# Altium PCB B6V2.PcbDoc
Units mil, origin at the board's own origin, x right, y up, seen from the top; angles counter-clockwise.
Board outline 2318.24 x 2318.21 mil, 2 copper layers (Top Layer, Bottom Layer); 122 components, 69 nets, 341 pads, 101 vias.
Unrouted connection lines stored in the file: 62.
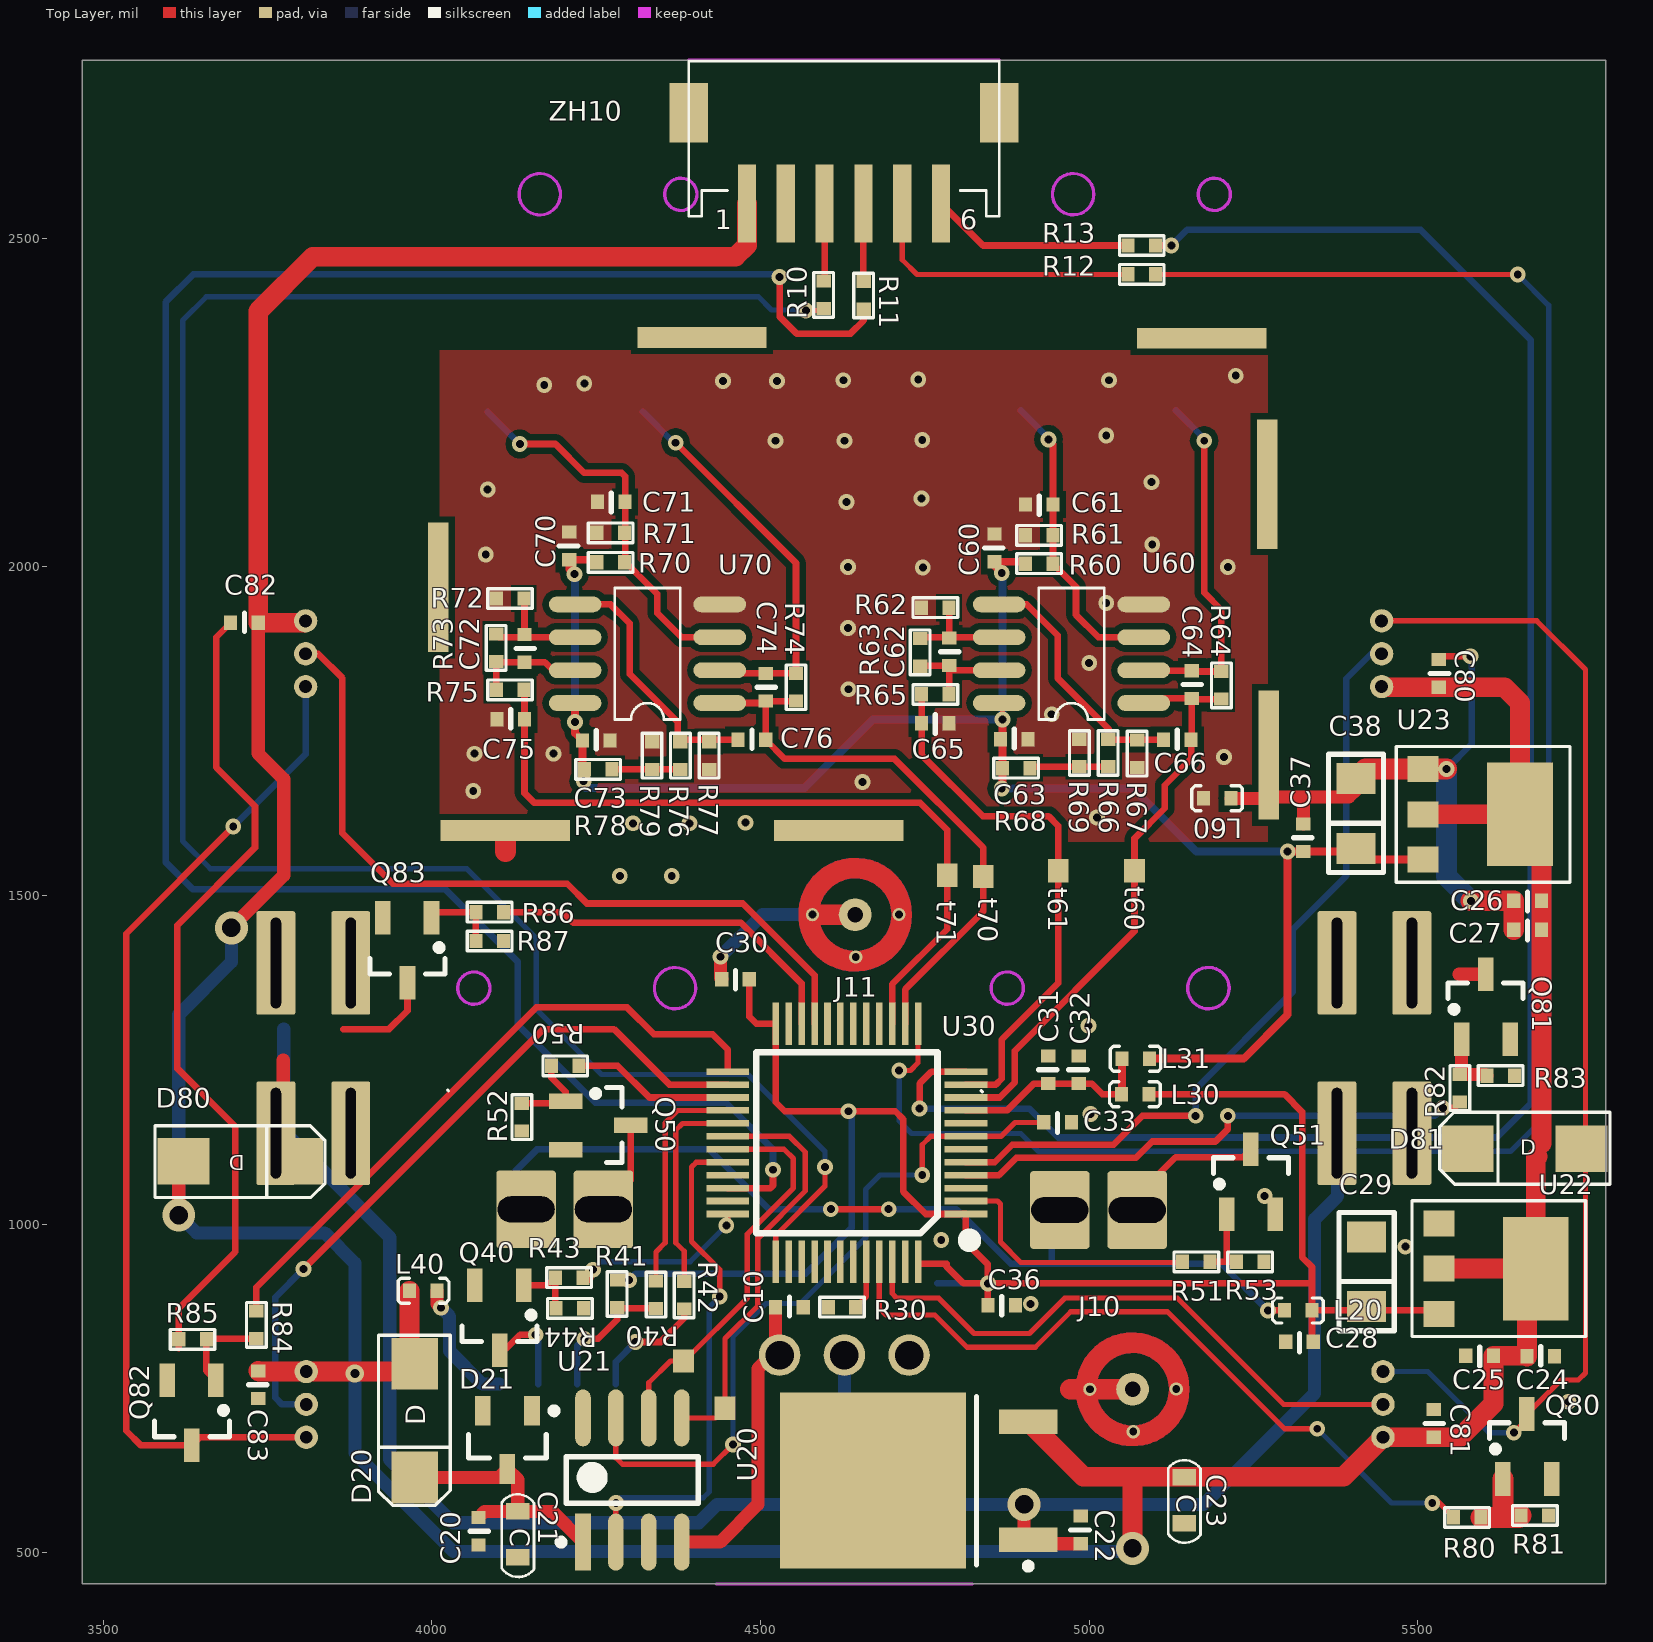
[diagram p0: Top Layer view]
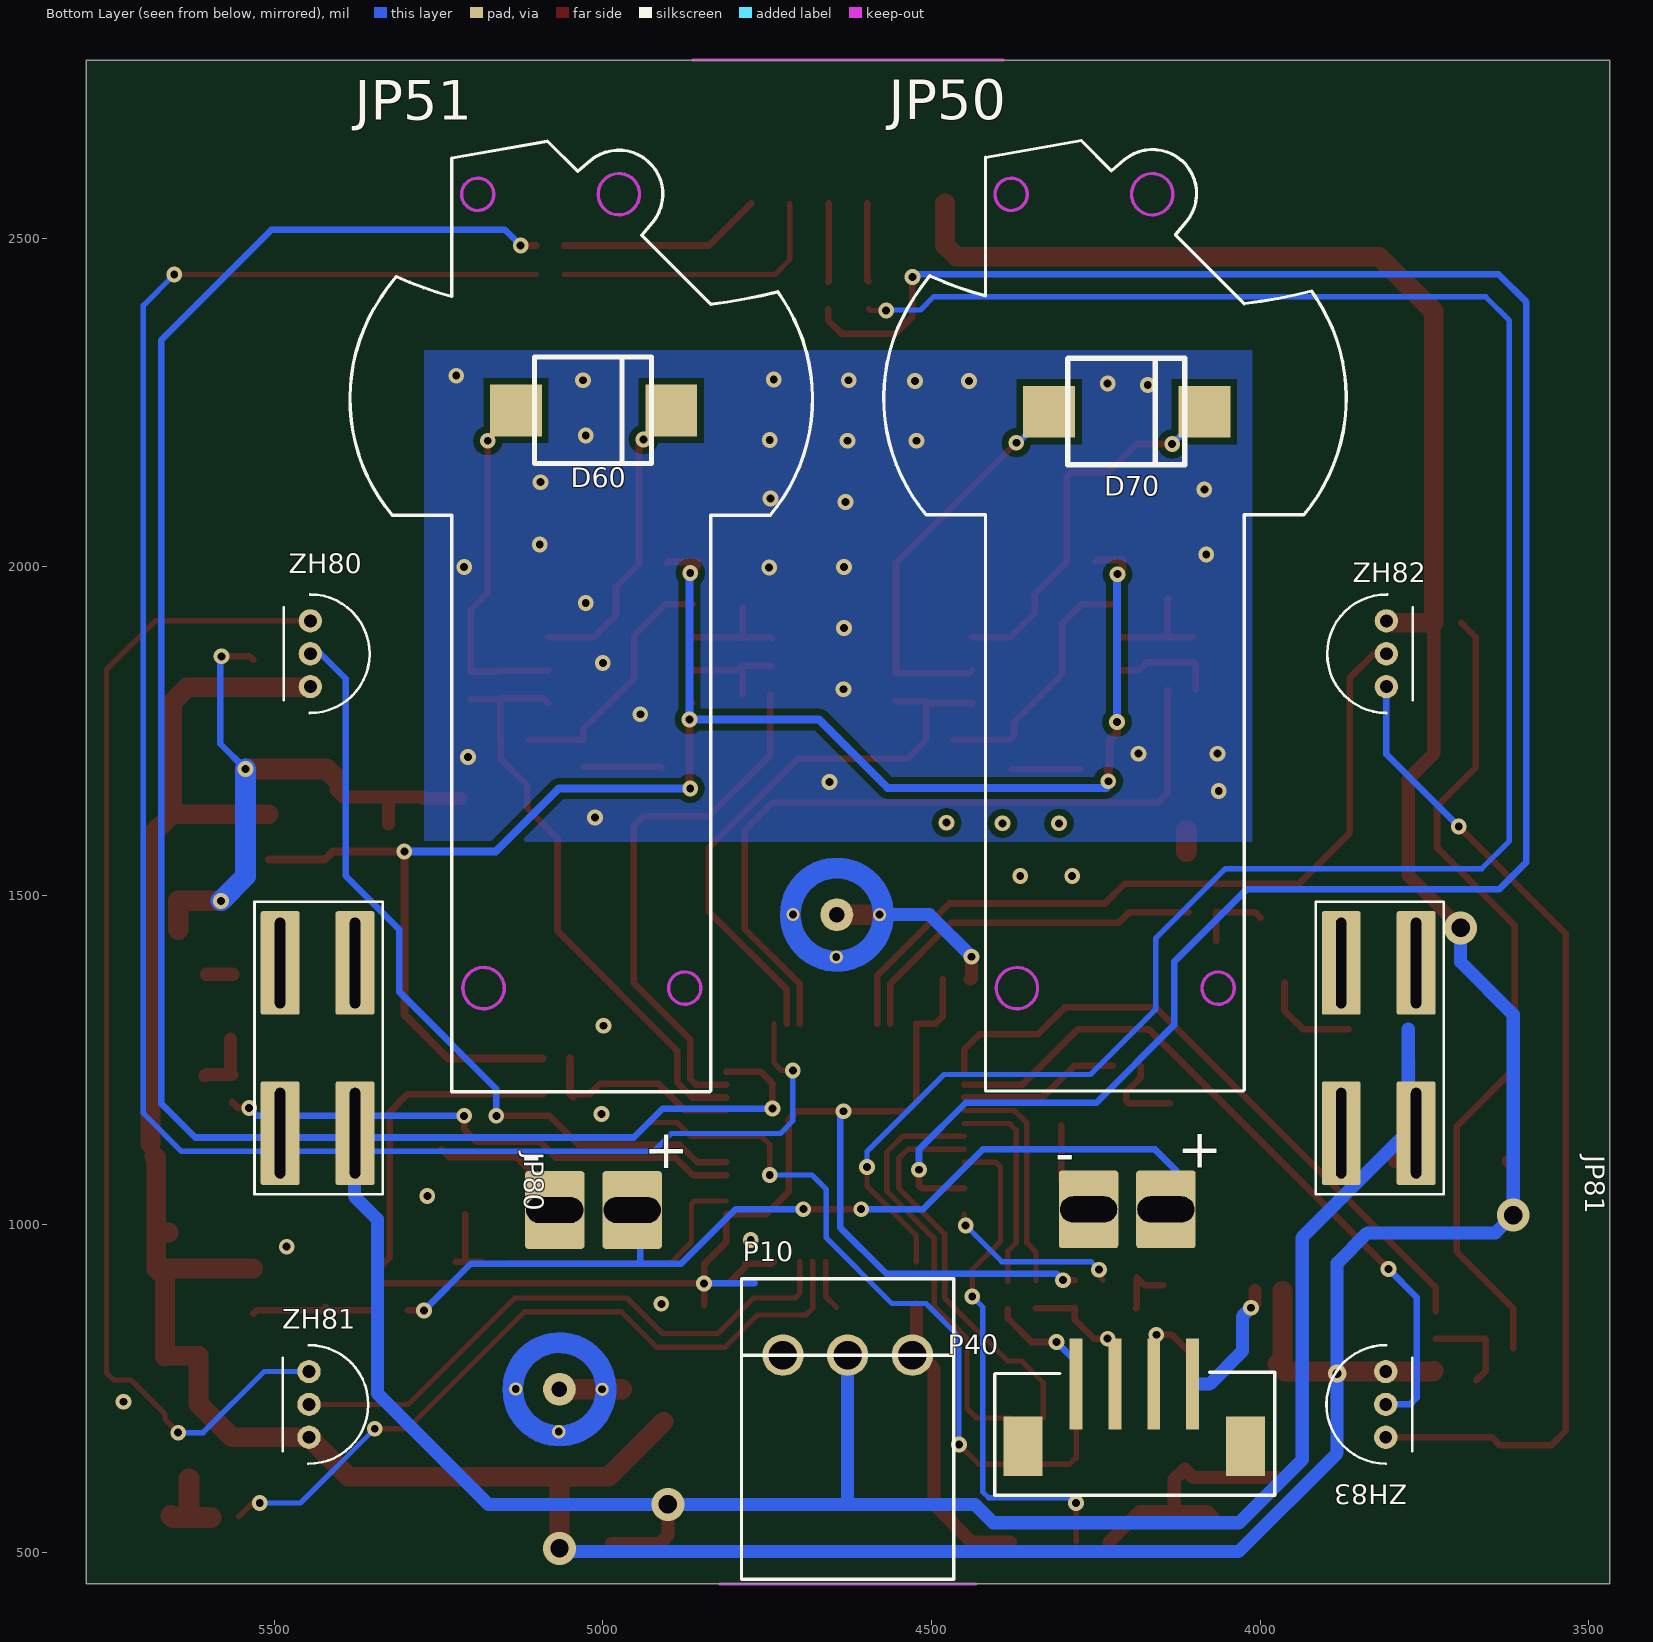
[diagram p1: Bottom Layer view, seen from below]

## Layer stack, top to bottom
Top Layer: signal copper 1.4
Dielectric: dielectric 12.6, FR-4, Dk 4.8
Bottom Layer: signal copper 1.4

## Board outline
3467.94,452.9 3467.94,2771.11 5786.17,2771.11 5786.17,452.9

## Design rules (kind name [scope] priority, off if disabled: settings)
Clearance Clearance_1 [(InNet('AGND') OR InNet('AGND2'))] p1: gap=10
Clearance [All] p2: gap=8
ComponentClearance [All] p1: gap=8 collisioncheckmode=3 verticalgap=8 showdistances=FALSE
PlaneConnect [All] p1: planeconnectstyle=Direct reliefexpansion=20 reliefentries=4 reliefconductorwidth=10 reliefairgap=10
PolygonConnect [All] p1: connectstyle=Direct reliefconductorwidth=10 reliefentries=4 polygonreliefangle="90 Angle"
RoutingVias [All] p1: holewidth=20 width=40 viastyle="Through Hole" minholewidth=12 minwidth=20 maxholewidth=100 maxwidth=200
SilkscreenOverComponentPads [All] p1: minsilkscreentomaskgap=10
SolderMaskExpansion [All] p1: expansion=4
Width [All] p1: maxlimit=100 minlimit=8 preferedwidth=10
25 further rules are at their usual default settings.

## Classes and differential pairs
component class CHECK2: C70 C71 C72 C73 C74 C75 C76 D70 R70 R71 R72 R73 R74 R75 R76 R77 R78 R79 t70 t71 U70
component class CHECK: C60 C61 C62 C63 C64 C65 C66 D60 L60 R60 R61 R62 R63 R64 R65 R66 R67 R68 R69 t60 t61 U60
component class LASER: JP50 JP51 Q50 Q51 R50 R51 R52 R53
component class FAN: L40 P40 Q40 R40 R41 R42 R43 R44
component class MCU_STM32: C30 C31 C32 C33 C36 L30 L31 R30 U30
component class POWER: C20 C21 C22 C23 C24 C25 C26 C27 C28 C29 C37 C38 D20 D21 L20 U20 U21 U22 U23
component class INTERFACE: C10 J10 J11 P10 R10 R11 R12 R13 ZH10
component class TEMP+HEATER: C80 C81 C82 C83 D80 D81 JP80 JP81 Q80 Q81 Q82 Q83 R80 R81 R82 R83 R84 R85 R86 R87 ZH80 ZH81 ZH82 ZH83

## Components (designator, comment, footprint, x,y, rotation, side; value= is the part's Value field where it differs from the comment)
C10 "220pF" C0402 4523,874 r0 top
C20 "0.1uf" C0402 4071,554 r270 top
C21 "22uF" C0603 4132,530 r270 top
C22 "0.1uf" C0402 4987,514 r90 top
C23 "22uF" C0603 5146,582 r270 top
C24 "22uF" C0402 5666,799 r0 top
C25 "0.1uf/50v" C0402 5615,800 r180 top
C26 "1uf/16v" C0402 5688,1492 r180 top
C27 "0.1uf/50v" C0402 5688,1448 r180 top
C28 "1uf/16v" C0402 5341,821 r180 top
C29 "10uf/16v" AVX_A 5422,981 r270 top
C30 "0.1uf" C0402 4483,1373 r180 top
C31 "1uf" C0402 4938,1214 r90 top
C32 "10nf" C0402 4984,1214 r90 top
C33 "1uf" C0402 4973,1155 r180 top
C36 "4.7uf" C0402 4888,877 r180 top
C37 "1uf/16v" C0402 5326,1567 r90 top
C38 "10uf/16v" AVX_A 5406,1678 r270 top
C60 "0.1uf" C0402 4856,2008 r90 top
C61 "0.1uf" C0402 4945,2095 r180 top
C62 "100pf" C0402 4787,1892 r270 top
C63 "0.1uf" C0402 4865,1738 r0 top
C64 "0.5pf" C0402 5156,1842 r270 top
C65 "100pf/16v" C0402 4787,1762 r180 top
C66 "68nf/16v" C0402 5113,1737 r0 top
C70 "0.1uf" C0402 4209,2011 r90 top
C71 "0.1uf" C0402 4294,2099 r180 top
C72 "100pf" C0402 4141,1897 r270 top
C73 "0.1uf" C0402 4229,1736 r0 top
C74 "0.5pf" C0402 4508,1838 r270 top
C75 "68nf/16v" C0402 4099,1768 r0 top
C76 "68nf/16v" C0402 4466,1737 r0 top
C80 "68nf/16v" C0402 5532,1859 r270 top
C81 "68nf/16v" C0402 5524,718 r270 top
C82 "68nf/16v" C0402 3694,1915 r0 top
C83 "68nf/16v" C0402 3736,735 r90 top
D20 "SS34" BGY220D 3966,721 r270 top
D21 "LBZX84C3V6LT1G" SOT-23_N 4115,672 r270 top
D60 "Photo Sen" PhotoSen 5014,2238 r90 bottom locked
D70 "Photo Sen" PhotoSen 4203,2236 r90 bottom locked
D80 "SS34" BGY220D 3689,1088 r0 top
D81 "SS34" BGY220D 5682,1123 r180 top
J10 "Socket" SPRING_2SIDES#1 5066,749 r0 top
J11 "Socket" SPRING_2SIDES#2 4644,1471 r0 top
JP50 "Header" LASERJACK#1 4291,2306 r180 bottom
JP51 "Header" LASERJACK#2 5103,2305 r180 bottom
JP80 "Header" PTC_4pin 5369.92,1075.56 r0 bottom locked
JP81 "Header" PTC_4pin 3755.75,1075.56 r0 bottom locked
L20 "Inductor" L0402 5299,869 r0 top
L30 "Inductor" L0402 5051,1198 r0 top
L31 "Inductor" L0402 5052,1252 r0 top
L40 "Inductor" L0402 4006,899 r180 top
L60 "Inductor" L0402 5176,1648 r0 top
P10 "Header 3" 53426-3 4789,801 r180 bottom
P40 "Header 4" ZH1.5_4pin_90b 4280,757 r180 bottom
Q40 "AO3401" SI2300 4103,848 r270 top
Q50 "AO3401" SI2300 4263,1151 r0 top
Q51 "AO3401" SI2300 5246,1075 r90 top
Q80 "AO3400" SI2300 5666,672 r90 top
Q81 "AO3400" SI2300 5603,1341 r90 top
Q82 "AO3400" SI2300 3635,703 r270 top
Q83 "AO3400" SI2300 3963,1407 r270 top
R10 "100R" R0402 4596,2393 r90 top
R11 "100R" R0402 4657,2392 r90 top
R12 "100R" R0402 5101,2445 r180 top
R13 "100R" R0402 5101,2489 r180 top
R30 "10K" R0402 4603,874 r0 top
R40 "10K" R0402 4341,872 r90 top
R41 "10K" R0402 4282,915 r270 top
R42 "30K" R0402 4384,913 r270 top
R43 "20" R0402 4188,919 r0 top
R44 "10k" R0402 4189,872 r0 top
R50 "20" R0402 4182,1241 r0 top
R51 "20" R0402 5184,943 r180 top
R52 "10k" R0402 4137,1184 r270 top
R53 "10k" R0402 5224,943 r0 top
R60 "2.7k" R0402 4903,2005 r0 top
R61 "1K" R0402 4945,2048 r180 top
R62 "3k" R0402 4745,1938 r0 top
R63 "220k" R0402 4743,1891 r270 top
R64 "10m" R0402 5201,1841 r270 top
R65 "2k" R0402 4745,1806 r0 top
R66 "1M" R0402 5029,1738 r270 top
R67 "510" R0402 5073,1737 r270 top
R68 "1M" R0402 4868,1694 r0 top
R69 "1M" R0402 4985,1696 r90 top
R70 "2.7k" R0402 4251,2007 r0 top
R71 "1K" R0402 4293,2052 r180 top
R72 "3k" R0402 4098,1952 r0 top
R73 "220k" R0402 4098,1898 r270 top
R74 "10m" R0402 4554,1838 r270 top
R75 "2k" R0402 4140,1813 r180 top
R76 "1M" R0402 4378,1734 r270 top
R77 "510" R0402 4422,1734 r270 top
R78 "510" R0402 4232,1692 r0 top
R79 "510" R0402 4335,1692 r90 top
R80 "20" R0402 5596,554 r180 top
R81 "10k" R0402 5657,557 r0 top
R82 "20" R0402 5564,1228 r270 top
R83 "10k" R0402 5605,1226 r0 top
R84 "20" R0402 3733,826 r90 top
R85 "10k" R0402 3657,825 r180 top
R86 "20" R0402 4067,1475 r0 top
R87 "10k" R0402 4067,1431 r0 top
t20 "pad_1X1" pad_0603 4383,793 r90 top
t21 "pad_1X1" pad_0603 4446,721 r90 top
t60 "pad_1X1" pad_0603 5069,1539 r90 top
t61 "pad_1X1" pad_0603 4953,1539 r90 top
t70 "pad_1X1" pad_0603 4839,1530 r90 top
t71 "pad_1X1" pad_0603 4784,1532 r90 top
U20 "BD750L5FP" TO252-3 4740,610 r180 top
U21 "TAJ1028/3V3" SO-8#1 4305,611 r90 top
U22 "HT7333" SOT-89 5491,1036 r270 top
U23 "HT7333" SOT-89 5467,1727 r270 top
U30 "STM32F030C8T6X" LQFP48S 4813,1016 r180 top
U60 "LMC6492" SO-8#2 5083,1793 r180 top
U70 "LMC6492" SO-8#2 4438,1793 r180 top
ZH10 "ZH-6ABW" ZH-6ABW 4627,2553 r0 top locked
ZH80 "ZH-3A" DS18B20 5445,1868 r90 bottom
ZH81 "ZH-3A" DS18B20 5447,726 r90 bottom locked
ZH82 "ZH-3A" DS18B20 3808,1868 r270 bottom
ZH83 "ZH-3A" DS18B20 3809,726 r270 bottom

## Footprints (in the part's own frame and the unit in brackets; to place one, negate y for a bottom-side part, rotate by r counter-clockwise, add the part's x,y. Pads: shape width x height; smd on the part's side, far side on the other; paste and mask are expansions set on the pad)
53426-3 [mm]
  round 1.6 hole 1.1: 1(1.6,0) 2(4.1,0) 3(6.6,0)
  silkscreen extent 0,-8.66 8.2,2.95
AVX_A [mm]
  rect 1.2x1.5 smd: 1(2.7,0) 2(0,0)
  silkscreen extent -0.94,-1.07 3.63,1.07
BGY220D [mm]
  rect 2x1.8 smd: 1(-1.7,0.2) 2(2.7,0.2)
  silkscreen extent -2.8,-1.2 3.77,1.58
C0402 [mil] "CAP_NP_C0402"
  rect 20x22 smd: 1(0,0) 2(42,0)
  silkscreen extent 21,-13 21,15
C0603 [mm]
  rect 0.635x0.9 smd: 1(-0.845,-0.031) 2(0.93,-0.031)
  silkscreen extent -1.5,-0.66 1.69,0.59
DS18B20 [mm]
  round 0.9 hole 0.5: 1(1.27,0) 2(0,0) 3(-1.27,0)
  silkscreen extent -2.29,-2.29 2.29,1.02
L0402 [mil]
  rect 20x22 smd: 1(-2,0) 2(40,0)
  silkscreen extent -20,-19 57,19
LASERJACK#1 [mm]
  rrect10% 2.3x3 hole 1 slot 2.2 at 0 deg: 1(3.75,-32.595) 2(0.76,-32.595)
  silkscreen extent -7.16,-28.02 10.72,8.71
LASERJACK#2 [mm]
  rrect10% 2.3x3 hole 1 slot 2.2 at 0 deg: 1(3.75,-32.595) 2(0.76,-32.595)
  Keep-Out Layer circle w0.127: c-1.994,-24.02 r0.8
  Keep-Out Layer circle w0.127: c3.234,6.658 r0.8
  Keep-Out Layer circle w0.127: c-2.219,6.654 r0.625
  Keep-Out Layer circle w0.127: c5.781,-24.02 r0.625
  silkscreen extent -7.16,-28.02 10.72,8.71
LQFP48S [mil] "DPIN-0.5"
  rect 65x10 smd: 1(0.42,0.29) 2(0.42,-19.39) 3(0.42,-39.08) 4(0.42,-58.76) 5(0.42,-78.45) 6(0.42,-98.13) 7(0.42,-117.82) 8(0.42,-137.5) 9(0.42,-157.19) 10(0.42,-176.87) 11(0.42,-196.56) 12(0.42,-216.24) 25(362.63,-216.24) 26(362.63,-196.56) 27(362.63,-176.87) 28(362.63,-157.19) 29(362.63,-137.5) 30(362.63,-117.82) 31(362.63,-98.13) 32(362.63,-78.45) 33(362.63,-58.76) 34(362.63,-39.08) 35(362.63,-19.39) 36(362.63,0.29)
  rect 10x65 smd: 13(73.26,-289.08) 14(92.94,-289.08) 15(112.63,-289.08) 16(132.31,-289.08) 17(152,-289.08) 18(171.68,-289.08) 19(191.37,-289.08) 20(211.05,-289.08) 21(230.74,-289.08) 22(250.42,-289.08) 23(270.11,-289.08) 24(289.79,-289.08) 37(289.79,73.13) 38(270.11,73.13) 39(250.42,73.13) 40(230.74,73.13) 41(211.05,73.13) 42(191.37,73.13) 43(171.68,73.13) 44(152,73.13) 45(132.31,73.13) 46(112.63,73.13) 47(92.94,73.13) 48(73.26,73.13)
  silkscreen extent -10,-246 319,46
pad_0603 [mm]
  rect 0.9x0.8 smd: 1(-0.025,0)
PhotoSen [mm]
  rect 2x2 smd: 1(0,-3) 2(0,3)
  silkscreen extent -2.04,-2.24 2.07,2.28
PTC_4pin [mm]
  rrect10% 1.5x4 hole 0.4 slot 3.5 at 90 deg: 1(0.178,-8.179) 1(0.178,-1.6) 2(3.073,-8.179) 2(3.073,-1.6)
  silkscreen extent -0.89,-10.54 4.06,0.76
R0402 [mil] "RESISTOR-R0402"
  rect 20x22 smd: 1(0,0) 2(42,0)
  silkscreen extent -13,-15 55,15
SI2300 [mm] "SOT23, 3-Leads, Body 2.9x2.4mm (max), Pitch 0.95mm, IPC Medium Density"
  rect 1.3x0.6 smd: 1(-1.511,0.927) 2(-1.511,-0.95) 3(1,0)
  silkscreen extent -0.48,-1.45 0.66,1.45
SO-8#1 [mm] "SOP, 8-Leads, Body 5.1x4.0mm (max), Pitch 1.27mm, IPC Medium Density"
  rect 2.2x0.6 smd: 1(-2.4,1.905)
  oval 2.2x0.6 smd: 2(-2.4,0.635) 3(-2.4,-0.635) 4(-2.4,-1.905) 5(2.4,-1.905) 6(2.4,-0.635) 7(2.4,0.635) 8(2.4,1.905)
  silkscreen extent -2.52,-2.55 0.9,2.88
SO-8#2 [mm]
  oval 2.032x0.61 smd: 1(0,0) 2(0,-1.27) 3(0,-2.54) 4(0,-3.81) 5(5.588,-3.81) 6(5.588,-2.54) 7(5.588,-1.27) 8(5.588,0)
  silkscreen extent 1.52,-4.44 4.06,0.64
SOT-23_N [mm] "SOT23, 3-Leads, Body 2.9x1.3mm, Pitch 0.95mm, Lead Span 2.5mm, IPC Medium Density"
  rect 1.15x0.6 smd: 1(-1.125,0.95) 2(-1.125,-0.95) 3(1.125,0)
  silkscreen extent -1.25,-1.5 0.7,1.93, body extent -0.7,-1.5 0.7,1.5, height 1.1
SOT-89 [mm]
  rect 1x1.2 smd: 1(0.876,1.044) 2(2.626,1.044) 3(4.376,1.044)
  rect 4x2.54 smd: 4(2.626,4.789)
  silkscreen extent 0,0 5.25,6.72
SPRING_2SIDES#1 [mil]
  round 20 hole 12.01: 1(-65,0)
  round 50 hole 23.62: 1(0,0)
  Top Layer circle w31.5: c0.05,0.03 r70.87
  Top Layer lines w31.5: -70.81,0 cw(c0.05,0.03) -70.81,0.03 ; -70.81,0 cw(c0.05,0.03) -70.81,0.03 ; -70.81,0 cw(c0.05,0.03) -70.81,0.03 ; -70.81,0 cw(c0.05,0.03) -70.81,0.03 ; -70.81,0 cw(c0.05,0.03) -70.81,0.03 ; -70.81,0 ccw(c0.05,0.03) 70.92,0.03 ; -70.81,0 ccw(c0.05,0.03) 70.92,0.03 ; -70.81,0 ccw(c0.05,0.03) 70.92,0.03 ; -70.81,0 ccw(c0.05,0.03) 70.92,0.03 ; -70.81,0 ccw(c0.05,0.03) 70.92,0.03 ; -70.81,0 ccw(c0.05,0.03) 70.92,0.03 ; -70.81,0 ccw(c0.05,0.03) 70.92,0.03 ; -70.81,0 ccw(c0.05,0.03) 70.92,0.03 ; -70.81,0 ccw(c0.05,0.03) 70.92,0.03 ; -70.81,0 ccw(c0.05,0.03) 70.92,0.03 ; -70.81,0 ccw(c0.05,0.03) 70.92,0.03 ; -70.81,0 ccw(c0.05,0.03) 70.92,0.03 ; -70.81,0 ccw(c0.05,0.03) 70.92,0.03 ; -70.81,0 ccw(c0.05,0.03) 70.92,0.03 ; -70.81,0 ccw(c0.05,0.03) 70.92,0.03 ; -70.81,0 ccw(c0.05,0.03) 70.92,0.03 ; -70.81,0 ccw(c0.05,0.03) 70.92,0.03 ; -70.81,0 ccw(c0.05,0.03) 70.92,0.03 ; -70.81,0 ccw(c0.05,0.03) 70.92,0.03 ; -70.81,0 cw(c0.05,0.03) -70.81,0.03 ; -70.81,0 ccw(c0.05,0.03) 70.92,0.03 ; -70.81,0 cw(c0.05,0.03) -70.81,0.03 ; -70.81,0 cw(c0.05,0.03) -70.81,0.03 ; -70.81,0 cw(c0.05,0.03) -70.81,0.03 ; -70.81,0 cw(c0.05,0.03) -70.81,0.03 ; -70.81,0 cw(c0.05,0.03) -70.81,0.03 ; -70.81,0 cw(c0.05,0.03) -70.81,0.03 ; -70.81,0 cw(c0.05,0.03) -70.81,0.03 ; -70.81,0 cw(c0.05,0.03) -70.81,0.03 ; -70.81,0 cw(c0.05,0.03) -70.81,0.03 ; -70.81,0 cw(c0.05,0.03) -70.81,0.03 ; -70.81,0 cw(c0.05,0.03) -70.81,0.03 ; -70.81,0 cw(c0.05,0.03) -70.81,0.03 ; -70.81,0 cw(c0.05,0.03) -70.81,0.03 ; -70.81,0 cw(c0.05,0.03) -70.81,0.03
  Bottom Layer circle w31.5: c0.05,0.03 r70.87
  Bottom Layer lines w31.5: -70.81,0 cw(c0.05,0.03) -70.81,0.03 ; -70.81,0 ccw(c0.05,0.03) 70.92,0.03 ; -70.81,0 ccw(c0.05,0.03) 70.92,0.03 ; -70.81,0 ccw(c0.05,0.03) 70.92,0.03 ; -70.81,0 ccw(c0.05,0.03) 70.92,0.03 ; -70.81,0 ccw(c0.05,0.03) 70.92,0.03 ; -70.81,0 ccw(c0.05,0.03) 70.92,0.03 ; -70.81,0 ccw(c0.05,0.03) 70.92,0.03 ; -70.81,0 ccw(c0.05,0.03) 70.92,0.03 ; -70.81,0 ccw(c0.05,0.03) 70.92,0.03 ; -70.81,0 ccw(c0.05,0.03) 70.92,0.03 ; -70.81,0 ccw(c0.05,0.03) 70.92,0.03 ; -70.81,0 ccw(c0.05,0.03) 70.92,0.03 ; -70.81,0 ccw(c0.05,0.03) 70.92,0.03 ; -70.81,0 cw(c0.05,0.03) -70.81,0.03 ; -70.81,0 ccw(c0.05,0.03) 70.92,0.03 ; -70.81,0 ccw(c0.05,0.03) 70.92,0.03 ; -70.81,0 ccw(c0.05,0.03) 70.92,0.03 ; -70.81,0 cw(c0.05,0.03) -70.81,0.03 ; -70.81,0 cw(c0.05,0.03) -70.81,0.03 ; -70.81,0 cw(c0.05,0.03) -70.81,0.03 ; -70.81,0 cw(c0.05,0.03) -70.81,0.03 ; -70.81,0 cw(c0.05,0.03) -70.81,0.03 ; -70.81,0 cw(c0.05,0.03) -70.81,0.03 ; -70.81,0 cw(c0.05,0.03) -70.81,0.03 ; -70.81,0 cw(c0.05,0.03) -70.81,0.03 ; -70.81,0 cw(c0.05,0.03) -70.81,0.03 ; -70.81,0 cw(c0.05,0.03) -70.81,0.03 ; -70.81,0 cw(c0.05,0.03) -70.81,0.03 ; -70.81,0 cw(c0.05,0.03) -70.81,0.03 ; -70.81,0 cw(c0.05,0.03) -70.81,0.03 ; -70.81,0 cw(c0.05,0.03) -70.81,0.03
SPRING_2SIDES#2 [mil]
  round 20 hole 12.01: 1(-65,0)
  round 50 hole 23.62: 1(0,0)
  Top Layer circle w31.5: c0.05,0.03 r70.87
  Bottom Layer circle w31.5: c0.05,0.03 r70.87
  Bottom Layer lines w31.5: -70.81,0.03 cw(c0.05,0.03) 70.92,0.03 ; -70.81,0.03 cw(c0.05,0.03) 70.92,0.03 ; -70.81,0.03 cw(c0.05,0.03) 70.92,0.03 ; -70.81,0.03 cw(c0.05,0.03) 70.92,0.03 ; -70.81,0.03 cw(c0.05,0.03) 70.92,0.03 ; -70.81,0.03 cw(c0.05,0.03) 70.92,0.03 ; -70.81,0.03 cw(c0.05,0.03) 70.92,0.03 ; -70.81,0.03 cw(c0.05,0.03) 70.92,0.03 ; -70.81,0.03 cw(c0.05,0.03) 70.92,0.03 ; -70.81,0.03 cw(c0.05,0.03) 70.92,0.03 ; -70.81,0.03 cw(c0.05,0.03) 70.92,0.03 ; -70.81,0.03 cw(c0.05,0.03) 70.92,0.03 ; -70.81,0.03 cw(c0.05,0.03) 70.92,0.03 ; -70.81,0.03 cw(c0.05,0.03) 70.92,0.03 ; -70.81,0.03 cw(c0.05,0.03) 70.92,0.03 ; -70.81,0.03 ccw(c0.05,0.03) 70.92,0.03 ; -70.81,0.03 ccw(c0.05,0.03) 70.92,0.03 ; -70.81,0.03 ccw(c0.05,0.03) 70.92,0.03 ; -70.81,0.03 ccw(c0.05,0.03) 70.92,0.03 ; -70.81,0.03 ccw(c0.05,0.03) 70.92,0.03 ; -70.81,0.03 ccw(c0.05,0.03) 70.92,0.03 ; -70.81,0.03 ccw(c0.05,0.03) 70.92,0.03 ; -70.81,0.03 ccw(c0.05,0.03) 70.92,0.03 ; -70.81,0.03 cw(c0.05,0.03) 70.92,0.03 ; -70.81,0.03 cw(c0.05,0.03) 70.92,0.03 ; -70.81,0.03 cw(c0.05,0.03) 70.92,0.03 ; -70.81,0.03 cw(c0.05,0.03) 70.92,0.03 ; -70.81,0.03 cw(c0.05,0.03) 70.92,0.03 ; -70.81,0.03 cw(c0.05,0.03) 70.92,0.03 ; -70.81,0.03 cw(c0.05,0.03) 70.92,0.03 ; -70.81,0.03 cw(c0.05,0.03) 70.92,0.03 ; -70.81,0.03 ccw(c0.05,0.03) 70.92,0.03 ; -70.81,0.03 ccw(c0.05,0.03) 70.92,0.03 ; -70.81,0.03 ccw(c0.05,0.03) 70.92,0.03 ; -70.81,0.03 ccw(c0.05,0.03) 70.92,0.03 ; -70.81,0.03 ccw(c0.05,0.03) 70.92,0.03 ; -70.81,0.03 ccw(c0.05,0.03) 70.92,0.03 ; -70.81,0.03 ccw(c0.05,0.03) 70.92,0.03 ; -70.81,0.03 ccw(c0.05,0.03) 70.92,0.03 ; -70.81,0.03 ccw(c0.05,0.03) 70.92,0.03 ; -70.81,0.03 ccw(c0.05,0.03) 70.92,0.03 ; -70.81,0.03 ccw(c0.05,0.03) 70.92,0.03 ; -70.81,0.03 ccw(c0.05,0.03) 70.92,0.03 ; -70.81,0.03 ccw(c0.05,0.03) 70.92,0.03 ; -70.81,0.03 ccw(c0.05,0.03) 70.92,0.03 ; -70.81,0.03 ccw(c0.05,0.03) 70.92,0.03
TO252-3 [mm] "D-PAK, 3-Pads, Body 5.5x6.5mm (max), IPC Medium Density"
  rect 2.25x0.95 smd: 1(-4.25,2.28) 3(-4.25,-2.28)
  rect 7.2x6.8 smd: 4(1.75,0)
  silkscreen extent -4.38,-3.25 -2.25,3.43, body extent -1.9,-3.25 3.6,3.25, height 2.38
ZH1.5_4pin_90b [mm]
  rect 1.5x2.3 smd: 0(-2.05,-2.4) 0(6.55,-2.4)
  rect 0.5x3.5 smd: 1(0,0) 2(1.5,0) 3(3,0) 4(4.5,0)
  silkscreen extent -3.15,-4.29 7.67,0.46
ZH-6ABW [mm]
  rect 1.5x2.3 smd: 0(-6,3.5) 0(6,3.5)
  rect 0.7x3 smd: 1(-3.75,0) 2(-2.25,0) 3(-0.75,0) 4(0.75,0) 5(2.25,0) 6(3.75,0)
  silkscreen extent -6,-0.5 6,5.5

## Part data
C10 C20 C22 C25 C26 C27 C28 C37: library part CC
C21 C23 C24: library part CTaA, "Tantalum Capacitor A"
C29 C38: library part "Cap Pol3", "Polarized Capacitor (Surface Mount)"
C30 C31 C32: library part "Cap Semi", "Capacitor (Semiconductor SIM Model)"
C33 C36: library part C0402, "Capacitor 0402"
C60 C61 C62 C63 C64 C65 C66 C70 C71 C72 C73 C74 C75 C76 C80 C81 C82 C83: library part CC, "C"
D20 D80 D81: library part 1N5819
D21: library part "Diode BAS70", "Silicon AF Schottky Diode for High-Speed Switching"
D60 D70: "Photosensitive Diode"
JP50 JP51 JP80 JP81: library part "Header 2", "Header, 2-Pin"
P10: "Header, 3-Pin"
P40: "Header, 4-Pin"
Q40 Q50 Q51 Q80 Q81 Q82 Q83: library part MOSFET-N, "N-Channel MOSFET"
R10 R11 R12 R13 R30 R43 R44 R50 R51 R52 R53 R80 R81 R82 R83 R84 R85 R86 R87: library part RES1
R40 R41 R42: library part R0402, "Resistor 0402"
R60 R61 R62 R63 R64 R65 R66 R67 R68 R69 R70 R71 R72 R73 R74 R75 R76 R77 R78 R79: library part RES1, "R"
U20: library part BD733L5FP
U21: library part TAJ1020
ZH10 ZH80 ZH81 ZH82 ZH83: "1.5mm"

## Free pads (board coordinates)
  rect 196.85x31.5 smd: 0(4411,2349) 1(5171,2348) 4(4112,1599) 5(4619,1599)
  rect 31.5x196.85 smd: 2(5271,2126) 2(5273,1714) 3(4010,1969)

## Via types
v1: diameter 24, hole 12, Top Layer to Bottom Layer, 92 vias
v2: diameter 50, hole 28, Top Layer to Bottom Layer, 4 vias
v3: diameter 20, hole 12, Top Layer to Bottom Layer, 4 vias
v4: diameter 28, hole 14, Top Layer to Bottom Layer, 1 vias

## Nets (pads, with @x,y where several pads share a name; then routed paths per layer and width w, separated by ;. In a path a pad name is that pad's centre, name@x,y a point inside that pad or via, vN(x,y) a via of type N, cw(c..) or ccw(c..) an arc to the next point about the centre after c; other vN are vias at no path point)
ADC_AC: C65.2 R65.1 t61.1 U30.11 | length 823
  Top Layer w10: R65.1 C65.2 4745,1714 4838,1621 4938,1621 4953,1606 t61.1 4953,1367 4867,1281 4867,1221.46 4858.1,1212.56 U30.11
ADC_AC2: C75.2 R75.1 t71.1 U30.15 | length 1153.2
  Top Layer w10: R75.1 4141,1812 C75.2 4141,1656 4156,1641 4743,1641 4784,1600 t71.1 4784,1449 4700.37,1365.37 U30.15
ADC_DC: C64.2 C66.2 R64.2 t60.1 U30.10 U60.1 | length 900.7
  Top Layer w10: U30.10 4863.87,1192.87 4887,1216 4887,1264 5069,1446 t60.1 5069,1587 5115,1633 5115,1668 5155,1708 C66.2 5156,1738 C64.2 ; U60.1 5090,1800 C64.2 ; R64.2 5157,1799 C64.2
ADC_DC2: C74.2 C76.2 R74.2 t70.1 U30.14 U70.1 | length 891.1
  Top Layer w10: U70.1 C74.2@4508,1793 ; R74.2 C74.2 C74.2@4508,1793 ; U30.14 4720.06,1357.06 4839,1476 t70.1 4839,1573 4704,1708 4537,1708 C76.2 C74.2@4508,1793
AGND: C60.2 C61.2 C63.2 C65.1 C70.2 C71.2 C73.2 C75.1 L60.1 R61.2 R62.1 R67.2 R69.2 R71.2 R72.1 R77.2 R79.2 U60.4 U70.4
  other v1: 5012,1619 4063,1659 4655,1673 5205,1711 4065,1716 4185,1716 4943,1776 4634,1814 5000,1854 4633,1907 5026,1945 4747,1999 4633,2000 5211,2000 5211,2000 4082,2019 5096,2034 4631,2099 4745,2104 4085,2118 5095,2129 4523,2192 4628,2192 4746,2193 5026,2200 4171,2277 4232,2279 4443,2283 4525,2283 4626,2284 5030,2284 4740,2285 5223,2291
AVCC33: C37.1 C38.1 C60.1 C63.1 C70.1 C73.1 L31.2 R60.1 R68.1 R70.1 R78.1 U23.3 U60.8 U70.8 | length 2690.1
  Top Layer w8: R78.1@4229,1695 R78.1 ; R70.1@4247,2011 R70.1 ; U60.8 4868,1788 v1(4868,1768) ; R60.1@4900,2008 R60.1
  Top Layer w12: v1(4217,1989) 4209,1997 C70.1 R70.1@4247,2011 ; U70.8 v1(4218,1764) 4218,1747 C73.1 R78.1@4229,1695 ; v1(4231,1674) 4231,1691 R78.1 ; C60.1@4856,2002 v1(4867,1991) ; C60.1 R60.1@4900,2008 ; v1(4867,1663) 4868,1664 R68.1 v1(4868,1768) ; L31.2 5235,1252 5302,1319 v1(5302,1567) C37.1 5410.7,1567 5423,1554.7 U23.3
  Bottom Layer w8: v1(4217,1989) v1@4218,1988 ; v1(4867,1991) v1@4868,1990
  Bottom Layer w12: v1(4218,1764) v1@4218,1988 ; v1(4231,1674) v1@4233,1674 ; v1@4234,1664 4567,1664 4671,1768 v1(4868,1768) v1@4868,1990 ; v1(4867,1663) 5067,1663 5163,1567 v1(5302,1567)
DVCC5: C23.1 C24.1 C25.1 C26.1 C27.1 C80.2 C81.2 C82.2 C83.2 D20.1 D80.1 D81.1 L40.2 U20.3 U22.2 U22.4 U23.2 U23.4 ZH10.1 ZH80.3 ZH81.3 ZH82.3 ZH83.3 | length 7186.5
  Top Layer w20: v2(3615,1014) 3615,1088.8 D80.1 ; v2(3695,1451) 3774.69,1530.69 3774.69,1677.31 3736,1716 C82.2
  Top Layer w30: C83.2 3737,776 ZH83.3 3961.94,776 D20.1 3966,795.8 L40.2 ; ZH82.3 3805,1915 C82.2 3736,2389 3819,2472 4462,2472 4479.36,2489.36 ZH10.1 ; U20.3 4991.09,616 5066,616 ; v2(5066,507) 5066,616 ; ZH80.3 5446,1817 C80.2 5632,1817 5655.53,1793.47 U23.4 ; U23.2 U23.4 ; U22.2 U22.4 ; U22.4@5660.4,987.6 U22.4@5661,987 ; 5681.93,1103.13 5679.53,1100.73 U22.4 ; 5688,1123 C27.1 C26.1 5688,1591.13 U23.4 ; 5066,616 5387,616 ZH81.3 C81.2 5564,676 5615,727 C25.1 5665,800 C24.1 5666,919.07 U22.4
  Bottom Layer w20: v2(3695,1451) 3695,1399 3615,1319 v2(3615,1014) 3642,987 3837,987 3883,941 v4(3883,773) 3883,652 4033,502 v2@5066,502
DVCC12: C22.1 D80.2 D81.2 JP80.1 JP81.1 P10.2 U20.1 | length 3143.7
  Top Layer w20: 3774,1249.69 3774,1117.17 D80.2 ; v2(4901,574) 4901,526.56 U20.1 4913.56,514 C22.1
  Bottom Layer w20: 3774.69,1297.05 3774.69,1141.31 3936,980 3936,642 4032,546 4406.11,546 4434.11,574 4627.57,574 ; P10.2 4627.57,574 ; JP80.1@5364.15,1087.99 5378,1074.14 5378,1043 5343,1008 5343,743 5174,574 v2(4901,574) 4627.57,574
DVCC33: C28.1 C29.1 C30.1 C36.2 L20.2 L30.2 R41.1 U22.3 U30.1 U30.24 U30.48 | length 2863.8
  Top Layer w10: R41.1 v1(4300,915) ; C30.1 4483,1316 4493.92,1305.08 U30.24 4523.21,1185.79 4537,1172 v1(4634,1172) 4705,1172 4717,1160 4717,1050 4751.29,1015.71 U30.1 4812.58,972.42 4846,939 v1(4846,910) ; U30.48 4742.61,940 4783,940 4783,936 4809,910 v1(4846,910) ; C36.2 v1(4846,910) ; L30.2 5297,1198 5324,1171 5324,950 5339,935 5339,910 ; C28.1 5339,823 L20.2 ; C29.1 C29.1@5416.3,869 ; U22.3 5526.8,869 C29.1@5416.3,869 ; v1(4846,910) 5339,910 ; L20.2 5339,910 ; L20.2 C29.1@5416.3,869
  Bottom Layer w10: v1(4300,915) 4310,925 4569,925 4639,995 4639,1167 v1(4634,1172) ; 4769,910 v1(4846,910)
FAN_EN: R43.2 U30.36 | length 258.4
  Top Layer w8: R43.2@4239,915 4242,918 ; v1(4448,998) 4450.37,995.63 U30.36
  Bottom Layer w8: v1(4245,931) 4257,943 4393,943 v1(4448,998)
GND: C10.2 C20.2 C21.2 C22.2 C23.2 C24.2 C25.2 C26.2 C27.2 C28.2 C29.2 C30.2 C31.2 C32.2 C33.1 C36.1 C37.2 C38.2 C80.1 C81.1 C82.1 C83.1 D21.1 J10.1 J11.1 L60.2 P10.1 pad.0 pad.1 pad.2 pad.3 pad.4 Q40.2 Q50.2 Q51.2 Q80.2 Q81.2 Q82.2 Q83.2 R30.1 R44.2 R52.2 R53.2 R81.2 R83.2 R85.2 R87.2 U20.4 U21.3 U22.1 U23.1 U30.8 U30.23 U30.47 ZH10.2 | length 2587.6
  Top Layer w10: 3615,811.75 R85.2 3615,872 3701,958 3701,1149 3613,1237 3613,1455 3731,1573 3731,1636 3672,1695 3672,1893 C82.1 ; C80.1 5537,1864 v1(5580,1864)
  Top Layer w20: v1(4439,1407) 4439,1375 C30.2 ; L60.2 pad.2@5273,1648 ; pad.2@5273,1650 5326,1650 ; C37.2 5326,1650 ; C38.2@5406,1661 5395,1650 5326,1650
  Top Layer w31.5: 4112,1567 pad.4 ; J11.1@4579,1471 J11.1@4644,1471 ; 4971.09,749 4995.19,749 5001,749 J10.1@5066,749 ; C38.2 5420.5,1692.5 U23.1 v1(5543.5,1692.5) ; v1(5581,1492) C26.2 C27.2
  Bottom Layer w10: v1(5543.5,1692.5) 5582,1731 5582,1862 v1(5580,1864)
  Bottom Layer w20: v1(4439,1407) 4503.03,1471.03 J11.1@4573.19,1471.03
  Bottom Layer w31.5: v1(5543.5,1692.5) 5543.5,1529.5 v1(5581,1492)
  other v1: 5729,730 4911,879 5481,966 4775,976 5267,1043 5002,1168 4999,1302 4286,1530 4365,1530
  other v3: 5067,684.5 5132.5,749.5 4645,1406.5 4710.5,1471.5
GPIO_FAN: R42.1 U30.29 | length 319.1
  Top Layer w8: R42.1 4384,959 4371,972 4371,1143 4381.5,1153.5 U30.29
GPIO_LASER: R50.2 U30.27 | length 246.3
  Top Layer w10: R50.2 4283,1241 4331.13,1192.87 U30.27
GPIO_LASER2: R51.2 U30.2 | length 402.1
  Top Layer w8: U30.2 4860.61,1035.39 4865,1031 4865,973 4896,942 R51.2@5142,942
HEATER1_EN: R82.2 U30.4 | length 809.2
  Top Layer w10: U30.4 4862.76,1074.76 4889,1101 5071,1101 5096,1126 5192,1126 5211,1145 v1(5211,1165) ; v1(5538,1177) 5555,1177 R82.2
  Bottom Layer w10: v1(5211,1165) 5526,1165 v1(5538,1177)
HEATER2_EN: R86.2 U30.22 | length 559.9
  Top Layer w10: R86.2 4199,1475 4215,1459 4470,1459 4562.58,1366.42 U30.22
LIN: C10.1 P10.3 U21.4 | length 459.7
  Top Layer w20: U21.4 4438.51,516.51 4496,574 4496,780.15 P10.3@4523,807.15 ; C10.1 P10.3@4523,807.15 ; P10.3 P10.3@4523,807.15
LIN_EN: U21.2 U30.32 | length 785.4
  Top Layer w8: U21.2 v1(4280,576) ; v1(4438,890) 4438,931 4395,974 4395,1087 4402.45,1094.45 U30.32
  Bottom Layer w8: v1(4280,576) 4288,584 4413,584 4422,593 4422,874 v1(4438,890)
LIN_RXD: t20.1 U21.6 U30.31 | length 603.4
  Top Layer w8: U21.6 4330,759 4363,792 t20.1 4384,792 4480,888 4480,985.25 4550,1055.25 4550,1100 4535.87,1114.13 U30.31
LIN_TXD: t21.1 U21.5 U30.30 | length 640
  Top Layer w8: U21.5 4431.49,705.49 t21.1 4446,826 4496,876 4496,978.63 4568,1050.63 4568,1110 4544.18,1133.82 U30.30
LVCC33: JP50.1 JP51.1 L20.1 | length 1402.2
  Top Layer w10: v1(4607,1023) v1(4695,1023) ; v1(5272,869) L20.1
  Bottom Layer w10: JP50.1@4127.86,1021.77 4127.86,1081.86 4160,1114 4422,1114 4513,1023 v1(4607,1023) ; v1(4695,1023) 4798,1023 4881,940 4943,940 ; JP51.1@4943,998.15 4943,940 ; v1(5272,869) 5201,940 4943,940
NetC20_1: C20.1 C21.1 D20.2 D21.3 U21.1 | length 399.7
  Top Layer w20: D20.2 4101.99,614.7 D21.3 4130.78,611.92 C21.1 ; C20.1 4080.25,563.25 C21.1 ; U21.1 4183.26,563.25 C21.1
NetC31_1: C31.1 C32.1 L30.1 L31.1 U30.9 | length 320
  Top Layer w10: U30.9 4875.19,1173.19 4916,1214 C31.1 C32.1 5004,1214 5020,1198 L30.1
  Top Layer w12: L30.1@5045,1194 L30.1 5050,1199 L31.1
NetC61_1: C61.1 D60.1 R60.2 R61.1 U60.3 | length 462.9
  Top Layer w10: v1(4938,2194) 4945,2187 C61.1 R61.1 R60.2 4980,1970 4980,1927 5014,1893 U60.3
  Bottom Layer w10: D60.1 4938,2195.89 v1(4938,2194)
NetC62_1: C62.1 R62.2 R63.1 U60.6 | length 166.8
  Top Layer w10: R63.1 4745,1893 C62.1@4787,1893 ; C62.1 C62.1@4787,1893 ; R62.2 C62.1@4787,1893 ; U60.6 C62.1@4787,1893
NetC62_2: C62.2 R63.2 R65.2 U60.7 | length 167.3
  Top Layer w10: R63.2 4744,1850 C62.2 ; R65.2 C62.2 ; U60.7 4794,1843 C62.2
NetC64_1: C64.1 D60.2 R64.1 U60.2 | length 544.4
  Top Layer w10: U60.2 5084,1842 C64.1 5157,1841 R64.1 5201,1935 5175,1961 v1(5175,2192)
  Bottom Layer w10: D60.2 5175,2195.11 v1(5175,2192)
NetC66_1: C66.1 R66.1 R67.1 U60.5 | length 382.8
  Top Layer w10: U60.5 4905,1943 4952,1896 4952,1831 5030,1753 5030,1737 R67.1 C66.1
NetC71_1: C71.1 D70.1 R70.2 R71.1 U70.3 | length 588.3
  Top Layer w10: v1(4133.89,2187) 4188,2187 4232,2143 4289,2143 4294,2138 C71.1 4294,2008 4343,1959 4343,1930 4380,1893 U70.3
  Bottom Layer w10: D70.1 v1(4133.89,2187)
NetC72_1: C72.1 R72.2 R73.1 U70.6 | length 170.4
  Top Layer w10: R73.1@4103,1893 U70.6 ; R72.2 4141,1951 C72.1
NetC72_2: C72.2 R73.2 R75.2 U70.7 | length 166.4
  Top Layer w10: R75.2 4098,1854 4099,1855 C72.2 4172,1855 4184,1843 U70.7
NetC74_1: C74.1 D70.2 R74.1 U70.2 | length 614.2
  Top Layer w10: v1(4371,2189) 4554,2006 R74.1 C74.1 4443,1838 U70.2
  Bottom Layer w10: D70.2 4368.11,2189 v1(4371,2189)
NetC76_1: C76.1 R76.1 R77.1 U70.5 | length 390.1
  Top Layer w10: U70.5 4272,1943 4301,1914 4301,1837 4374,1764 4374,1744 4381,1737 C76.1
NetJP50_2: JP50.2 Q50.3 | length 84.2
  Top Layer w10: JP50.2@4302.37,1066.77 Q50.3
NetJP51_2: JP51.2 Q51.3 | length 224.1
  Top Layer w10: JP51.2 5073.08,1043.61 5131.47,1102 5233.63,1102 Q51.3
NetJP80_2: JP80.2 Q81.3 | length 40.3
  Top Layer w20: 5562.74,1380.37 Q81.3
NetJP81_2: JP81.2 Q83.3 | length 152
  Top Layer w10: 3865.24,1297.05 3935.05,1297.05 3963,1325 Q83.3
NetL40_1: L40.1 P40.4 | length 196.4
  Top Layer w20: L40.1 4008,879 v1(4014,873)
  Bottom Layer w20: v1(4014,873) 4027,860 4027,807 4077,757 P40.4
NetP40_1: P40.1 R42.2 | length 179.3
  Top Layer w10: v1(4310,821) 4348,821 4384,857 R42.2
  Bottom Layer w10: P40.1 4280,791 v1(4310,821)
NetP40_2: P40.2 R40.1 R41.2 | length 213
  Top Layer w10: v1(4232,826) 4253,826 4282,855 R41.2 4283,872 R40.1
  Bottom Layer w10: P40.2 4220.94,814.94 v1(4232,826)
NetP40_3: P40.3 Q40.3 | length 133.3
  Top Layer w10: Q40.3@4111,808.63 4134.37,832 v1(4158,832)
  Bottom Layer w10: v1(4158,832) 4161.89,828.11 P40.3
NetQ40_2: Q40.1 R43.1 R44.1 | length 92.7
  Top Layer w10: Q40.1@4147.5,907.5 4176.5,907.5 R43.1 4188,873 R44.1
NetQ50_2: Q50.1 R50.1 R52.1 | length 130.4
  Top Layer w10: R52.1 4200,1184 Q50.1 4203.5,1201.5 4182,1223 R50.1
NetQ51_2: Q51.1 R51.1 R53.1 | length 113.5
  Top Layer w10: R51.1 5207,943 ; Q51.1 5209.5,945.5 5207,943 ; R53.1 5207,943
NetQ80_1: Q80.3 ZH80.1 ZH81.1 | length 1799.8
  Top Layer w8: ZH80.1 5681,1918 5755,1844 5755,774 5744,763 5717.63,763 Q80.3 5666,703 v1(5646,683)
  Bottom Layer w8: ZH81.1 5515,776 5608,683 v1(5646,683)
NetQ80_2: Q80.1 R80.1 R81.1 | length 121.4
  Top Layer w31.5: R80.1 5631,554 ; Q80.1 5629.5,555.5 5631,554 ; R81.1 5654,554 5631,554
NetQ81_2: Q81.1 R82.1 R83.1 | length 96.4
  Top Layer w20: Q81.1 5566.5,1230.5 R82.1 5603,1228 R83.1
NetQ82_1: Q82.3 ZH82.1 ZH83.1 | length 1533.5
  Top Layer w10: v1(3698,1605) 3535,1442 3535,686 3557.37,663.63 Q82.3 3647.37,676 ZH83.1
  Bottom Layer w10: v1(3698,1605) 3808,1715 ZH82.1
NetQ82_2: Q82.1 R84.1 R85.1 | length 144.9
  Top Layer w10: Q82.1 3657,777 R85.1 3658,826 R84.1
NetQ83_2: Q83.1 R86.1 R87.1 | length 115
  Top Layer w10: Q83.1 4008,1475 R86.1 R87.1
NetR10_2: R10.2 ZH10.3 | length 118.6
  Top Layer w10: R10.2 4597.47,2436.47 ZH10.3
NetR11_2: R11.2 ZH10.4 | length 119.2
  Top Layer w10: ZH10.4 4656.53,2434.47 R11.2
NetR12_2: R12.2 ZH10.5 | length 438.3
  Top Layer w8: ZH10.5 4715.58,2467.42 4738,2445 R12.2
NetR13_2: R13.2 ZH10.6 | length 310.9
  Top Layer w10: ZH10.6 4838.64,2489 R13.2
NetR30_2: R30.2 U30.44 | length 75.5
  Top Layer w8: R30.2 4661,890 U30.44
NetR66_2: R66.2 R68.2 R69.1 | length 119.8
  Top Layer w10: R68.2 4912,1696 R69.1 R66.2
NetR76_2: R76.2 R78.2 R79.1 | length 104
  Top Layer w10: R78.2 R76.2
RSTN: C33.2 U21.7 U30.7 | length 1099.1
  Top Layer w8: U21.7 4280,645 4290,635 4428,635 v1(4458,665) ; v1(4746,1075) 4746,1121 4758.82,1133.82 U30.7 ; U30.7@4811.39,1135 U30.7 ; C33.2 4887,1155 4865.82,1133.82 U30.7
  Bottom Layer w8: v1(4458,665) 4458,829 4508.5,879.5 4560.5,879.5 4660,979 4660,1053 4682,1075 v1(4746,1075)
RX: R12.1 U30.13 | length 3047.5
  Top Layer w8: v1(4711,1234) 4728,1234 4739.74,1245.74 U30.13 ; R12.1 v1(5652,2445)
  Bottom Layer w8: v1(4711,1234) 4711,1157 4730,1138 4896,1138 4923,1111 5641,1111 5699,1169 5699,2398 v1(5652,2445)
SWCLK: R10.1 U30.37 | length 3227.3
  Top Layer w8: U30.37 4523.21,983.21 4598,1058 v1(4598,1087) ; v1(4569,2390) 4593,2390 R10.1
  Bottom Layer w8: v1(4569,2390) 4569,2391 4517,2391 4497,2411 3657,2411 3621,2375 3621,1583 3663,1541 4053,1541 4159,1435 4159,1327 4258,1228 4481,1228 4598,1111 v1(4598,1087)
SWDIO: R11.1 U30.34 | length 3315.7
  Top Layer w10: U30.34 4509.92,1055.08 ; 4510,1055 4509.92,1055.08 ; v1(4519,1083) 4519,1059 4515.08,1055.08 4509.92,1055.08 ; v1(4529,2441) 4529,2381 4555,2355 4637,2355 4657,2375 R11.1
  Bottom Layer w10: v1(4519,1083) 4519,1114 4448,1185 4249,1185 4131,1303 4131,1399 4020,1510 3636,1510 3595,1551 3595,2403 3637,2445 4525,2445 v1(4529,2441)
TEMP1_EN: R80.2 U30.45 | length 1121
  Top Layer w8: U30.45 4680.69,872.31 4691,862 4765,862 4814,813 4918,813 4972,867 5119,867 5297,689 v1(5347,689) ; v1(5522,576) 5523,577 5532.14,577 R80.2@5554.15,554.99
  Bottom Layer w8: v1(5347,689) 5460,576 v1(5522,576)
TEMP2_EN: R84.2 U30.25 | length 989.9
  Top Layer w10: R84.2 3733,904 4159,1330 4297,1330 4338,1289 4427,1289 4450.37,1265.63 U30.25
TEMP_DATA1: U30.5 ZH80.2 | length 1208.2
  Top Layer w10: U30.5 4856.45,1094.45 4883,1121 5037,1121 5081,1165 v1(5162,1165)
  Bottom Layer w10: v1(5162,1165) 5162,1206 5310,1354 5310,1449 5391,1530 5391,1830 5429,1868 ZH80.2
TEMP_DATA2: U30.46 ZH81.2 | length 909.5
  Top Layer w8: U30.46 4700.37,894.63 4707,888 4771,888 4825,834 4909,834 4963,888 5134,888 5296,726 ZH81.2
TEMP_DATA3: U30.21 ZH82.2 | length 1188.8
  Top Layer w10: ZH82.2 3827,1868 3864,1831 3864,1595 3941,1518 4206,1518 4236,1488 4473,1488 4582.26,1378.74 U30.21
TEMP_DATA4: U30.26 ZH83.2 | length 1096.5
  Top Layer w10: v1(3805,932) 4170,1297 4277,1297 4361.44,1212.56 U30.26
  Bottom Layer w10: v1(3805,932) 3762,889 3762,736 3772,726 ZH83.2
TIM_FAN: R40.2 U30.28 | length 349.1
  Top Layer w8: R40.2 4341,958 4355,972 4355,1154 4374.19,1173.19 U30.28
TX: R13.1 U30.12 | length 2897.4
  Top Layer w10: v1(4742,1176) 4742,1214 4760.24,1232.24 U30.12 ; R13.1 v1(5125,2489)
  Bottom Layer w10: v1(4742,1176) 4909,1176 4953,1132 5620,1132 5672,1184 5672,2345 5504,2513 5149,2513 v1(5125,2489)
pads on no net: D21.2 P40.0 U21.8 U30.3 U30.6 U30.16 U30.17 U30.18 U30.19 U30.20 U30.33 U30.35 U30.38 U30.39 U30.40 U30.41 U30.42 U30.43 ZH10.0
copper on no net:
  other v1: 4306,1610 4392,1610 4477,1611

## Polygon pours and split planes (outlines as drawn)
AGND on Bottom Layer "Bottom Layer-No Net" (solid, remove dead copper, pour order 2): 4012,2330 5272,2330 5272,1581 5271,1582 4012,1582 4012,2330
AGND on Top Layer "Bottom Layer-No Net" (solid, remove dead copper, pour order 4): 4012,2330 5272,2330 5272,1582 4012,1582 4012,2330

## Keep-outs
Keep-Out Layer:
  circle w5: c4063.88,1359.25 r24.61
  circle w5: c4378.85,2566.88 r24.61
  circle w5: c5190.22,2566.88 r24.61
  circle w5: c4875.26,1359.25 r24.61
  circle w5: c4975.56,2567.03 r31.5
  circle w5: c4164.18,2567.03 r31.5
  circle w5: c4370,1359.25 r31.5
  circle w5: c5181.38,1359.25 r31.5
  lines w5: 4390.83,2771.11 4863.27,2771.11 ; 4432.17,452.9 4821.94,452.9

## Other copper
Top Layer:
  pour cut-out: 5285,1570 5288,1573 5721,1573 5721,2051.64 5292.02,2049.2 5285,1671
  pour cut-out: 3543,2035 3996,2035 3996,1573 3997,1572 3995,1570 3543,1570
  pour cut-out: 3993,2350 5285,2350 5285,1570 3995,1570 3999,1574 3999,2351
Bottom Layer:
  pour cut-out: 5290,2051 5721,2051 5721,1570 5285,1570 5283.5,1571.5 5290,1578
  pour cut-out: 3539.51,2037 3999,2037 3999,1568 3543,1568
  pour cut-out: 3999,2350 5285,2350 5285,1573 5282,1570 3999,1570

## Silkscreen, mask and mechanical layers (free items; w line width, h text height)
Mechanical 1:
  drawing of 287 lines, arcs and shapes, not listed
Mechanical 15:
  lines w4: 4989,1566 4989.19,1566.19 ; 4012.01,1581.98 4012.01,2330.01 5271.85,2330.01 5271.85,1582.13 5272,1581.98 4012.01,1581.98

## Text inside footprints (layer, text, board x,y; h text height)
C21: Top Overlay "C" at 4118.97,537.66 h30 r270
C23: Top Overlay "C" at 5132.97,589.66 h30 r270
D20: Top Overlay "D" at 3960.09,694.43 h30 r270
D80: Top Overlay "D" at 3715.57,1082.09 h23
D81: Top Overlay "D" at 5655.43,1128.91 h23 r180
JP50: Bottom Overlay "-" at 4311.5,1079 h60; Bottom Overlay "+" at 4126,1086 h60
JP51: Bottom Overlay "-" at 5123.5,1078 h60; Bottom Overlay "+" at 4938,1085 h60
ZH10: Top Overlay "6" at 4804.17,2513.63 h30; Top Overlay "1" at 4430.15,2513.63 h30